# Altium PCB MiniGen.PcbDoc
Units mil, origin at the board's own origin, x right, y up, seen from the top; angles counter-clockwise.
Board outline 700 x 1300 mil, 4 copper layers (Top, Route2, Route15, Bottom), stack 18.156 mil thick; 34 components, 17 nets, 103 pads, 22 vias.
Unrouted connection lines stored in the file: 9.
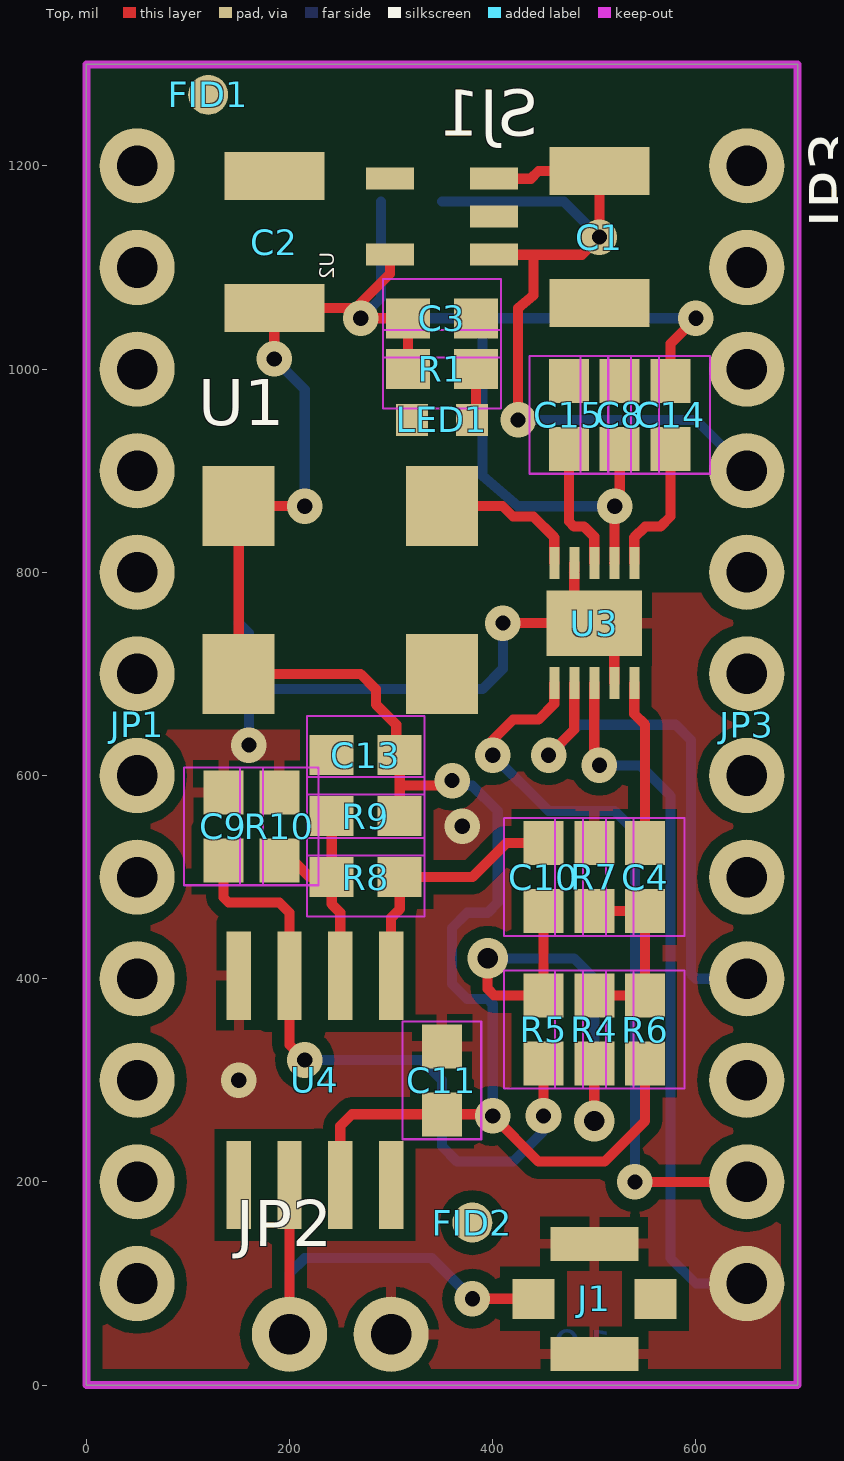
[diagram p0: Top view]
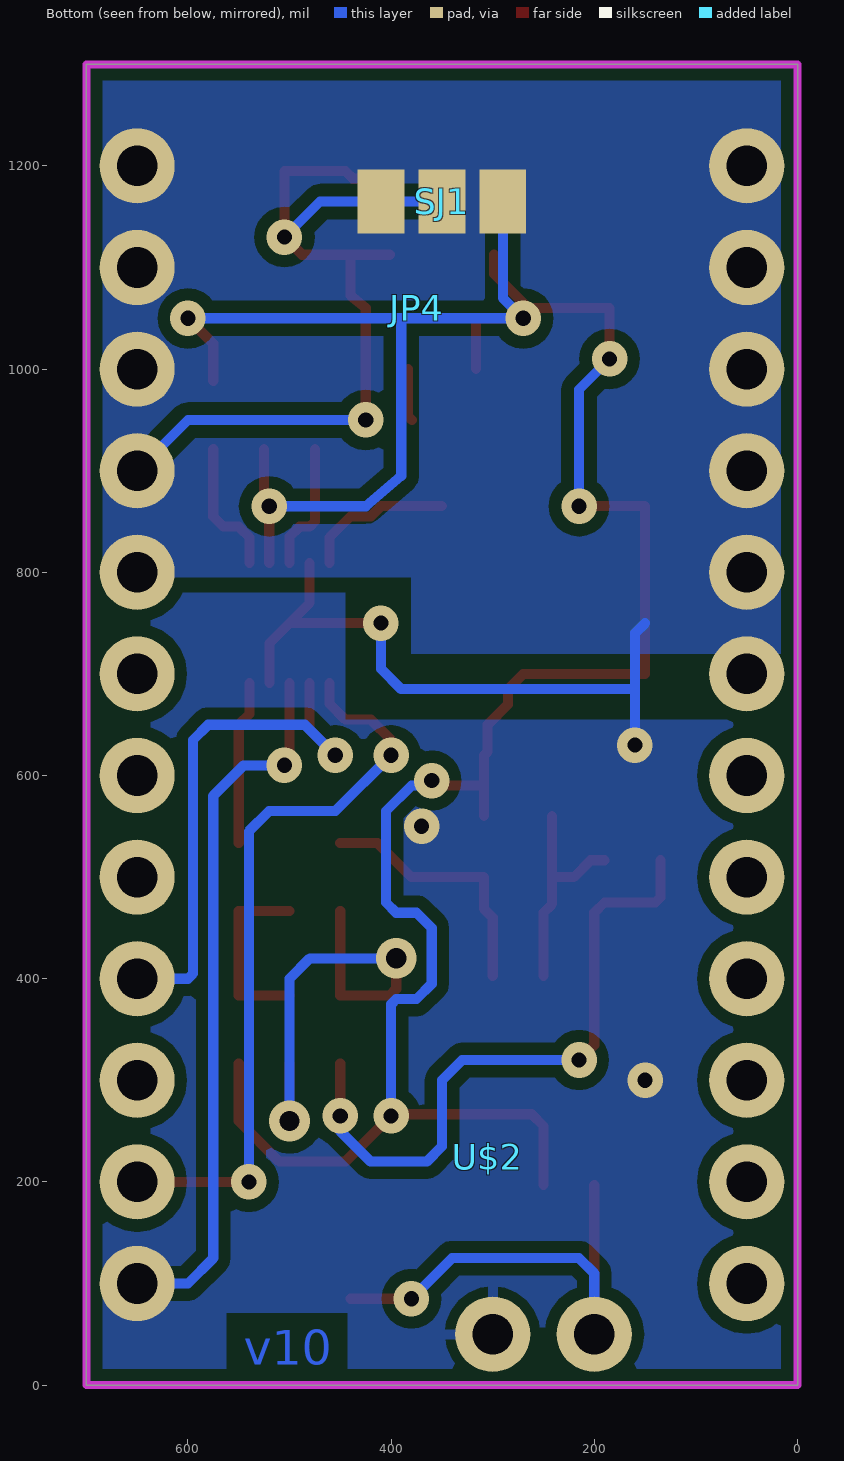
[diagram p1: Bottom view, seen from below]

## Layer stack, top to bottom
Top Solder: solder mask 0.4, Solder Resist, Dk 3.5
Top: signal copper 1.378
Dielectric 1: dielectric 12.6, FR-4, Dk 4.8
Route2: signal copper 1.4
Route15: signal copper 1.4
Bottom: signal copper 1.378
Bottom Solder: solder mask 0.4, Solder Resist, Dk 3.5

## Board outline
0,1300 0,0 700,0 700,1300

## Design rules (kind name [scope] priority, off if disabled: settings)
BoardOutlineClearance mdCopperDimension [All] p1: gap=10 ignorepadtopadclearanceinfootprint=FALSE except(0: Arc-SplitContinuation Track-SplitContinuation SMDPad-SplitContinuation THPad-SplitContinuation Via-SplitContinuation Fill-SplitContinuation Poly-SplitContinuation Region-SplitContinuation Text-SplitContinuation; 8: Poly-OutlineEdge Poly-CavityEdge Poly-CutoutEdge Poly-SplitBarrior)
Clearance Clearance_for_PolygonClass_Isolate_12 [InPolygonClass('Isolate_12') vs IsArc Or IsTrack Or IsPad Or IsVia Or IsFill Or IsRegion Or IsText] p1: gap=12 ignorepadtopadclearanceinfootprint=FALSE
Clearance "Clearance (Same Net)" [All] p2: gap=8 ignorepadtopadclearanceinfootprint=FALSE
Clearance [All] p3: gap=8 ignorepadtopadclearanceinfootprint=FALSE
HoleSize [All] p1: absolutevalues=TRUE maxlimit=100000 minlimit=20 maxpercent=80.000 minpercent=20.000
HoleToHoleClearance mdDrill [All] p1: gap=8 allowstackedmicrovias=TRUE
MinimumSolderMaskSliver [All] p1 off: minsoldermaskwidth=10
PasteMaskExpansion Expansion_SMDPaste_OFF [InPadClass('SMDPaste_OFF')] p1: expansion=0
PasteMaskExpansion mlMinCreamFrame [All] p2: expansion=0
PolygonConnect PolygonConnect_For_PolygonThermal_ON_Width100000_Gap100000 [InPolygonClass('PolygonThermal_ON_Width100000_Gap100000') vs Not IsVia] p1: connectstyle=Relief reliefconductorwidth=10 reliefentries=4 polygonreliefangle="90 Angle" airgapwidth=10
PolygonConnect ThermalVias [IsVia] p2: connectstyle=Direct reliefconductorwidth=10 reliefentries=4 polygonreliefangle="90 Angle" airgapwidth=10
PolygonConnect [All] p3: connectstyle=Relief reliefconductorwidth=10 reliefentries=4 polygonreliefangle="90 Angle" airgapwidth=10
RoutingVias [All] p1: holewidth=20 width=40 viastyle="Through Hole" minholewidth=20 minwidth=40 maxholewidth=100 maxwidth=100
SolderMaskExpansion mlMinStopFrame [All] p1: expansion=4 istentingtop=FALSE
Width [All] p1: maxlimit=10000 minlimit=8 preferedwidth=8
26 further rules are at their usual default settings.

## Classes and differential pairs
polygon class PolygonThermal_ON_Width100000_Gap100000: Polygon_1_Net_GND Polygon_2_Net_GND Polygon_3_Net_GND Polygon_4_Net_GND
polygon class Isolate_12: Polygon_1_Net_GND Polygon_2_Net_GND Polygon_3_Net_GND Polygon_4_Net_GND
pad class SMDPaste_OFF: FID1-1 FID2-1 U3-P$0

## Components (designator, comment, footprint, x,y, rotation, side; value= is the part's Value field where it differs from the comment)
C1 "10uF" EIA3528 505,1130 r90 top
C2 "10uF" EIA3528 185,1125 r270 top
C3 "0.1uF" 0603-CAP 350,1050 r0 top
C4 "10uF, 6.3V" 0603-CAP 550,500 r270 top
C8 "0.1uF" 0603-CAP 525,955 r90 top
C9 "18pF" 0603-CAP 135,550 r270 top
C10 "18pF" 0603-CAP 450,500 r90 top
C11 "0.1uF" 0603-CAP 350,300 r270 top
C13 "0.1uF" 0603-CAP 275,620 r180 top
C14 "10nF" 0603-CAP 575,955 r90 top
C15 "0.1uF" 0603-CAP 475,955 r90 top
FID1 "" FIDUCIAL-1X2 120,1270 r0 top
FID2 "" FIDUCIAL-1X2 380,160 r0 top
FRAME1 "" CREATIVE_COMMONS -234.6,-550 r0 top
J1 "" U.FL 500,85 r180 top
JP1 "M12PTH" 1X12 50,100 r90 top
JP2 "M02PTH" 1X02 200,50 r0 top
JP3 "M12PTH" 1X12 650,1200 r270 top
JP4 "" SFE-NEW-WEBLOGO 375,1060 r270 bottom
LED1 "RED" LED-0603 350,950 r90 top
R1 "330" 0603-RES 350,1000 r0 top
R4 "1.8K" 0603-RES 500,350 r90 top
R5 "2.55K" 0603-RES 450,350 r90 top
R6 "10K" 0603-RES 550,350 r270 top
R7 "10K" 0603-RES 500,500 r270 top
R8 "787" 0603-RES 275,500 r180 top
R9 "1.8K" 0603-RES 275,560 r0 top
R10 "1.8K" 0603-RES 190,550 r270 top
SJ1 "" SJ_2 350,1165 r180 bottom
U1 "16MHz" CRYSTAL-SMD-7X5 150,700 r0 top
U2 "3.3V" SOT23-5 350,1150 r90 top
U3 "AD9837" AD9837 500,750 r270 top
U4 "" SO08 225,300 r180 top
U$2 "" OSHW-LOGO-S 305,225 r270 bottom

## Footprints (in the part's own frame and the unit in brackets; to place one, negate y for a bottom-side part, rotate by r counter-clockwise, add the part's x,y. Pads: shape width x height; smd on the part's side, far side on the other; paste and mask are expansions set on the pad)
1X02 [mil] "1X02"
  round 74 hole 40: 1(0,0) 2(100,0)
1X12 [mil] "1X12"
  round 74 hole 40: 1(0,0) 2(100,0) 3(200,0) 4(300,0) 5(400,0) 6(500,0) 7(600,0) 8(700,0) 9(800,0) 10(900,0) 11(1000,0) 12(1100,0)
0603-CAP [mm] "0603-CAP"
  rect 1.1x1 smd: 1(-0.85,0) 2(0.85,0)
  Top keep-out lines w0.051: -1.473,-0.983 -1.473,0.983 1.473,0.983 1.473,-0.983 -1.473,-0.983
0603-RES [mm] "0603-RES"
  rect 1.1x1 smd: 1(-0.85,0) 2(0.85,0)
  Top keep-out lines w0.051: -1.473,-0.983 -1.473,0.983 1.473,0.983 1.473,-0.983 -1.473,-0.983
AD9837 [mil] "AD9837"
  rect 64.57x93.7 smd paste+0: P$0(0,0)
  rect 31.5x9.84 smd: P$1(-59.06,39.37) P$2(-59.06,19.69) P$3(-59.06,0) P$4(-59.06,-19.69) P$5(-59.06,-39.37) P$6(59.06,-39.37) P$7(59.06,-19.69) P$8(59.06,0) P$9(59.06,19.69) P$10(59.06,39.37)
CREATIVE_COMMONS [mil] "CREATIVE_COMMONS"
CRYSTAL-SMD-7X5 [mm] "CRYSTAL-SMD-7X5"
  rect 1.8x2 smd: P$1(0,0) P$2(5.08,0) P$3(5.08,4.2) P$4(0,4.2)
EIA3528 [mm] "EIA3528"
  rect 1.2x2.5 smd: A(1.65,0) C(-1.65,0)
FIDUCIAL-1X2 [mm] "FIDUCIAL-1X2"
  rrect100% 1x1 smd paste+0: 1(0,0)
LED-0603 [mil] "LED-0603"
  rect 31.5x31.5 smd: A(0,-29.53) C(0,29.53)
OSHW-LOGO-S [mil] "OSHW-LOGO-S"
SFE-NEW-WEBLOGO [mil] "SFE-NEW-WEBLOGO"
SJ_2 [mil] "SJ_2"
  rect 46x63 smd: 1(-60,0) 2(0,0) 3(60,0)
SO08 [mil] "SO08"
  rect 24x87 smd: 1(-75,-103) 2(-25,-103) 3(25,-103) 4(75,-103) 5(75,103) 6(25,103) 7(-25,103) 8(-75,103)
SOT23-5 [mil] "SOT23-5"
  rect 21.65x47.24 smd: 1(-37.4,-51.19) 2(0,-51.19) 3(37.4,-51.19) 4(37.4,51.19) 5(-37.4,51.19)
U.FL [mm] "U.FL"
  rect 2.2x0.85 smd: P$1(0,1.375) P$2(0,-1.375)
  rect 1.05x1 smd: P$3(1.525,0) P$4(-1.525,0)

## Part data
C1 C2: library part EIA3528, PackageName=EIA3528
C3 C4 C8 C9 C10 C11 C13 C14 C15: library part 0603-CAP, PackageName=0603-CAP
FID1 FID2: library part FIDUCIAL-1X2, PackageName=FIDUCIAL-1X2
FRAME1: library part CREATIVE_COMMONS, PackageName=CREATIVE_COMMONS
J1: library part U.FL, PackageName=U.FL
JP1 JP3: library part 1X12, PackageName=1X12
JP2: library part 1X02, PackageName=1X02
JP4: library part SFE-NEW-WEBLOGO, PackageName=SFE-NEW-WEBLOGO
LED1: library part LED-0603, PackageName=LED-0603
R1 R4 R5 R6 R7 R8 R9 R10: library part 0603-RES, PackageName=0603-RES
SJ1: library part SJ_2, PackageName=SJ_2
U1: library part CRYSTAL-SMD-7X5, PackageName=CRYSTAL-SMD-7X5
U2: library part SOT23-5, PackageName=SOT23-5
U4: library part SO08, PackageName=SO08
U$2: library part OSHW-LOGO-S, PackageName=OSHW-LOGO-S
U3: PackageName=AD9837

## Via types
v1: diameter 35/35/35/35 (per signal layer), hole 15, Top to Bottom, 20 vias
v2: diameter 40/40/40/40 (per signal layer), hole 20, Top to Bottom, 2 vias

## Nets (pads, with @x,y where several pads share a name; then routed paths per layer and width w, separated by ;. In a path a pad name is that pad's centre, name@x,y a point inside that pad or via, vN(x,y) a via of type N, cw(c..) or ccw(c..) an arc to the next point about the centre after c; other vN are vias at no path point)
FSYNC: JP3.12 U3.P$8 | length 705.8
  Top w10: U3.P$8 500,615 v1(505,610)
  Bottom w10: v1(505,610) 545,610 575,580 575,125 600,100 JP3.12
GND: C1.C C2.C C3.2 C8.2 C9.1 C11.1 C13.2 C15.2 J1.P$1 J1.P$2 JP1.9 JP2.2 JP3.2 LED1.C R7.1 R10.1 U1.P$2 U2.2 U3.P$0 U3.P$4 U3.P$9 U4.4 | length 651.8
  Top w10: v1(410,750) U3.P$0 ; U3.P$4 480.32,769.68 U3.P$0 ; U3.P$9 519.68,730.32 U3.P$0
  Bottom w10: 150,750 160,740 160,685 ; v1(160,630) 160,685 ; v1(410,750) 410,705 390,685 160,685
  other v1: 150,300 370,550
MCLK: U1.P$3 U3.P$5 | length 148.8
  Top w10: U1.P$3 409.65,865.35 420,855 440,855 460.63,834.37 U3.P$5
N$3: LED1.A R1.2 | length 51.6
  Top w10: LED1.A 383.46,953.94 R1.2
N$7: C9.2 R5.1 U4.3 | length 652.4
  Top w10: C9.2 135,480 140,475 190,475 200,465 U4.3 200,335 v1(215,320) ; v1(450,265) R5.1
  Bottom w10: v1(215,320) 330,320 350,300 350,235 365,220 420,220 450,250 v1(450,265)
N$8: C10.1 R4.1 R5.2 | length 480.6
  Top w10: v2(395,420) 395,390 401.54,383.46 R5.2 C10.1 ; v2(500,260) R4.1
  Bottom w10: v2(395,420) 480,420 500,400 v2(500,260)
N$9: C10.2 R8.1 U4.1 | length 255.9
  Top w10: U4.1 300,460 308.46,468.46 R8.1 380,500 413.46,533.46 C10.2
N$10: C15.1 U3.P$3 | length 128.7
  Top w10: C15.1 475,850 480,845 490,845 500,835 U3.P$3
N$12: R8.2 R9.1 R10.2 U4.2 | length 218.9
  Top w10: R10.2 203.46,516.54 220,500 R8.2 ; R9.1 R8.2 ; U4.2 250,465 241.54,473.46 R8.2
N$14: C4.2 R4.2 R6.1 R7.2 | length 183.1
  Top w10: R4.2 R6.1 C4.2 R7.2
N$21: C4.1 U3.P$10 | length 161.9
  Top w10: U3.P$10 539.37,660.63 550,650 C4.1
N$23: C14.1 U3.P$1 | length 136
  Top w10: U3.P$1 539.37,834.37 550,845 565,845 575,855 C14.1
OUT: J1.P$3 JP2.1 U4.6 | length 469.7
  Top w10: JP2.1 U4.6 ; v1(380,85) J1.P$3
  Bottom w10: JP2.1 200,110 215,125 340,125 v1(380,85)
SCLK: JP3.9 U3.P$7 | length 527.1
  Top w10: v1(455,620) 480.32,645.32 U3.P$7
  Bottom w10: v1(455,620) 485,650 580,650 595,635 595,405 600,400 JP3.9
SDATA: JP3.11 U3.P$6 | length 736.8
  Top w10: v1(400,620) 400,635 420,655 445,655 460.63,670.63 U3.P$6 ; v1(540,200) JP3.11
  Bottom w10: v1(400,620) 455,565 520,565 540,545 v1(540,200)
VCC: C2.A C3.1 C8.1 C11.2 C13.1 C14.2 R1.1 R6.2 R9.2 SJ1.3 U1.P$1 U1.P$4 U2.5 U3.P$2 U4.7 | length 2873.3
  Top w10: v1(185,1010) C2.A 259.96,1060.04 v1(270,1050) ; v1(215,865) 209.65,865.35 U1.P$4 U1.P$1 270,700 285,685 285,670 305,650 305,623.46 C13.1 308.46,590.05 ; U4.7 250,255 261.54,266.54 C11.2 398.46,266.54 v1(400,265) 445,220 510,220 550,260 R6.2 ; U2.5 298.82,1093.82 270,1065 v1(270,1050) ; C3.1@300,1050 C3.1 ; R9.2 308.46,590.05 ; R1.1 C3.1 ; v1(360,595) 359.95,590.05 308.46,590.05 ; U3.P$2 520,809.37 v1(520,865) 525,855 C8.1 ; C14.2 575,1025 v1(600,1050) ; v1(270,1050) C3.1
  Bottom w10: v1(185,1010) 215,980 v1(215,865) ; SJ1.3 290,1070 v1(270,1050) 390,1050 ; v1(360,595) 364.95,590.05 379.95,590.05 405,565 405,475 395,465 375,465 360,450 360,395 375,380 395,380 400,375 v1(400,265) ; v1(520,865) 425,865 390,895 390,1050 ; v1(600,1050) 390,1050
VIN: C1.A JP3.4 SJ1.1 SJ1.2 U2.1 U2.3 | length 867.7
  Top w10: U2.1 440,1112.6 ; U2.3 437.4,1187.4 445,1195 C1.A C1.A v1(505,1130) 487.6,1112.6 440,1112.6 ; v1(425,950) 425,1060 440,1072.6 440,1112.6
  Bottom w10: SJ1.2 SJ1.1 470,1165 v1(505,1130) ; v1(425,950) 600,950 JP3.4
pads on no net: FID1.1 FID2.1 J1.P$4 JP1.1 JP1.2 JP1.3 JP1.4 JP1.5 JP1.6 JP1.7 JP1.8 JP1.10 JP1.11 JP1.12 JP3.1 JP3.3 JP3.5 JP3.6 JP3.7 JP3.8 JP3.10 U2.4 U4.5 U4.8

## Polygon pours and split planes (outlines as drawn)
GND on Bottom "Polygon_4_Net_GND" (solid, remove dead copper, pour order 3): -5,-5 -5,655 445,655 445,780 705,780 705,-5
GND on Bottom "Polygon_1_Net_GND" (solid, remove dead copper, pour order 0): -5,1305 -5,720 380,720 380,795 705,795 705,1305
GND on Top "Polygon_3_Net_GND" (solid, remove dead copper, pour order 2): -5,-5 -5,645 445,645 445,780 705,780 705,-5
GND on Top "Polygon_2_Net_GND" (solid, remove dead copper, pour order 1): -5,1305 -5,670 380,670 380,795 705,795 705,1305

## Keep-outs
Keep-Out Layer:
  the board outline again, w8

## Other copper
Bottom:
  text "v10" at 545,20 h34

## Silkscreen, mask and mechanical layers (free items; w line width, h text height)
Dimension:
  the board outline again, w8
tDocu:
  text "Pete Dokter and Anne Mahaffey" at 850,-550 h59.5
tValues:
  text "Pete Dokter and Anne Mahaffey" at 725,-425 h59.5
tPlace:
  text "+" at 70,-20 h85
  text "-" at 360,-20 h85
bPlace:
  text "3.3V" at 240,1225 h34 r90
  text "5V" at 500,1200 h34 r90
  text "GND" at 595,1080 h34
  text "AD9837 MiniGen" at 420,1025 h34 r90
  text "GND" at 185.64,886.01 h34
  text "VIN" at 595,880 h34
  text "SCLK" at 595,380 h34
  text "SDATA" at 595,180 h34
  text "OUTPUT" at 355,100 h34
  text "FSYNC" at 595,85 h34
  text "+" at 155,0 h85
  text "-" at 420,-5 h85

## Text inside footprints (layer, text, board x,y; h text height)
FRAME1: tDocu "Designed by:" at 215.4,-550 h108.5; tDocu "http://creativecommons.org/licenses/by-sa/3.0" at -234.6,-450 h108.5; tDocu "Released under the Creative Commons Attribution Share-Alike 3.0 License" at -1034.6,-350 h108.5